# EAGLE board CNR_Temp_Sens_Eagle (EAGLE 7.5.0)
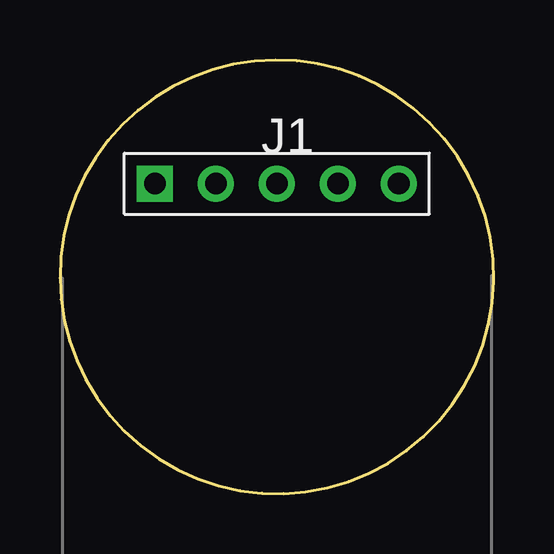
[diagram p0: board, top side]
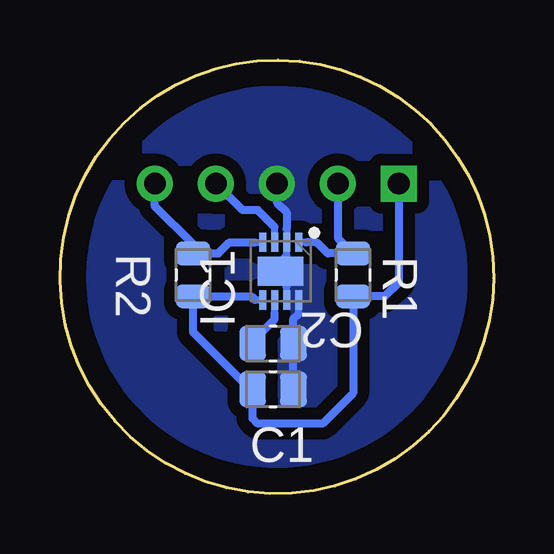
[diagram p1: board, bottom side, seen from below]

Size 18.07 x 18.07 mm. Coordinates in mm from the lower left corner, seen from the top.
Outline: 2.69,2.6 arc180 15.39,15.46 arc180 2.69,2.6
Copper layers (1*16): Top 0.035mm / dielectric 1.5mm / Bottom 0.035mm
Design rules "default *": minimum track width 10mil, minimum drill 0.61mm, track to track 8mil, track to pad 8mil, pad to pad 8mil, via to via 8mil, smd to smd 8mil, copper to edge 40mil, drill to drill 8mil, minimum pad ring 0mil, minimum via ring 8mil, stop-mask expansion 2mil, vias tented up to drill 19mil, thermal gap 10mil
Net classes: 0 Default: width 0.33 mm, clearance 0.33 mm

## Footprints (pad centres in the part's own frame; a part is rotated, then mirrored left to right if it is on the bottom)
CAP_0805_N = smd 1.11 x 1.47: 1 -0.85,0; 2 0.85,0
CAP_0805_N_C2 = smd 1.11 x 1.47: 1 -0.85,0; 2 0.85,0
SON50P250X250X100-9N-D = smd 0.8 x 0.3: 1 -1.2,0.75; 2 -1.2,0.25; 3 -1.2,-0.25; 4 -1.2,-0.75; 5 1.2,-0.75; 6 1.2,-0.25; 7 1.2,0.25; 8 1.2,0.75 | smd 1.2 x 1.9: 9 0,0
HDR-1x5 = drill 0.9 pad 1.5 square: 1 -5.08,0 | drill 0.9 pad 1.5: 2 -2.54,0; 3 0,0; 4 2.54,0; 5 5.08,0
RES_0805_N = smd 0.98 x 1.42: 1 -0.895,0; 2 0.895,0
RES_0805_N_R2 = smd 0.98 x 1.42: 1 -0.895,0; 2 0.895,0

## Placement (x,y rotation side)
C1  100nF  [CAP_0805_N]  9.19,4.35 0 bottom
C2  100nF  [CAP_0805_N_C2]  9.19,6.25 180 bottom
IC1  SHT35-DIS-B  [SON50P250X250X100-9N-D]  8.88,9.27 270 bottom
J1  HDR-1X5  [HDR-1x5]  9.04,12.92 0 top
R1  15k  [RES_0805_N]  5.86,9.11 270 bottom
R2  15k  [RES_0805_N_R2]  12.53,9.11 270 bottom

## Library data of the parts
C1 C2 = common; UNIQUE_NAME: CAP_0805_INCH
IC1 = common; DATASHEET: https://componentsearchengine.com/Datasheets/1/SHT35-DIS-B.pdf; DESCRIPTION: RH&T Sensor +/-1.5%RH +/-0.2C DFN8 Sensirion SHT35-DIS-B Temperature & Humidity Sensor, -40 +125 C, 8-Pin DFN; HEIGHT: 1 mm; MANUFACTURER_NAME: Sensirion; MANUFACTURER_PART_NUMBER: SHT35-DIS-B; MOUSER_PART_NUMBER: 403-SHT35-DIS-B; MOUSER_PRICE/STOCK: https://www.mouser.com/Search/Refine.aspx?Keyword=403-SHT35-DIS-B
J1 = common; UNIQUE_NAME: HDR-1x5
R1 R2 = common; UNIQUE_NAME: RES_0805_INCH

## Nets
ALERT: IC1.3 J1.4
GND: C1.2 C2.1 IC1.2 IC1.7 IC1.8 IC1.9 J1.3
Net_5: C2.2 IC1.6
SCL: IC1.4 J1.5 R2.1
SDA: IC1.1 J1.2 R1.1
VCC: C1.1 IC1.5 J1.1 R1.2 R2.2

## Tracks (layer width: path | path; a pad name or v marks a point on that pad's centre or on a via)
ALERT
  Bottom 0.3: IC1.3 9.13,11.11
  Bottom 0.33: 9.13,11.11 9.83,11.81 10.46,11.81 J1.4
GND
  Bottom 0.3: IC1.7 8.63,8.64 | 8.63,9.91 IC1.2 8.63,11.04 | 8.13,7.51 IC1.8
  Bottom 0.33: C1.2 C2.1 8.35,7.29 8.13,7.51 | 8.63,8.64 8.63,9.02 IC1.9 8.88,9.66 8.63,9.91 | J1.3 9.04,12.13 8.63,11.72 8.63,11.04
  pour Bottom (isolate 0.5, no thermals): 2.98,2.9 3.7,2.26 4.5,1.71 5.35,1.24 6.24,0.88 7.17,0.62 8.12,0.46 9.09,0.41 10.05,0.47 11.01,0.64 11.93,0.92 12.82,1.29 13.67,1.76 14.45,2.33 15.17,2.98 15.81,3.7 16.36,4.49 16.82,5.34 17.19,6.24 17.45,7.17 17.61,8.12 17.65,9.09 17.59,10.05 17.43,11 17.15,11.93 16.78,12.82 16.31,13.66 15.74,14.45 15.09,15.16 14.37,15.8 13.58,16.36 12.73,16.82 11.83,17.18 10.9,17.45 9.95,17.6 8.98,17.65 8.02,17.59 7.07,17.42 6.14,17.15 5.25,16.77 4.41,16.3 3.62,15.74 2.9,15.09 2.26,14.36 1.71,13.57 1.25,12.72 0.88,11.83 0.62,10.9 0.47,9.94 0.42,8.98 0.48,8.01 0.65,7.06 0.92,6.14 1.29,5.24 1.77,4.4 2.33,3.62
Net_5
  Bottom 0.3: 9.13,7.51 IC1.6
  Bottom 0.33: C2.2 10.04,6.36 9.13,7.27 9.13,7.51
SCL
  Bottom 0.3: 9.94,10.47 | 9.94,10.47 IC1.4
  Bottom 0.33: 9.94,10.47 11.01,10.47 11.47,10.01 R2.1 12.53,10.38 14.12,11.97 J1.5
SDA
  Bottom 0.3: 7.81,10.47 | 7.81,10.47 IC1.1
  Bottom 0.33: J1.2 6.5,10.64 R1.1 6.92,10.01 7.38,10.47 7.81,10.47
VCC
  Bottom 0.3: 9.94,8.07 IC1.5
  Bottom 0.33: 9.94,8.07 10.09,8.22 R2.2 12.53,6.73 10.15,4.35 C1.1 10.04,3.14 9.83,2.92 7.13,2.92 5.86,4.19 R1.2 4.53,8.22 3.96,8.79 J1.1

## Text on the board
tPlace: J1
bPlace: R1 | IC1 | R2 | C2 | C1